# Altium PCB Plate_E.PcbDoc
Units mm, origin at the board's own origin, x right, y up, seen from the top; angles counter-clockwise.
Board outline 100 x 100 mm, 2 copper layers (Top Layer, Bottom Layer), stack 0.97 mm thick; 6 components, 2 nets, 10 pads, 0 vias.
Unrouted connection lines stored in the file: 2.
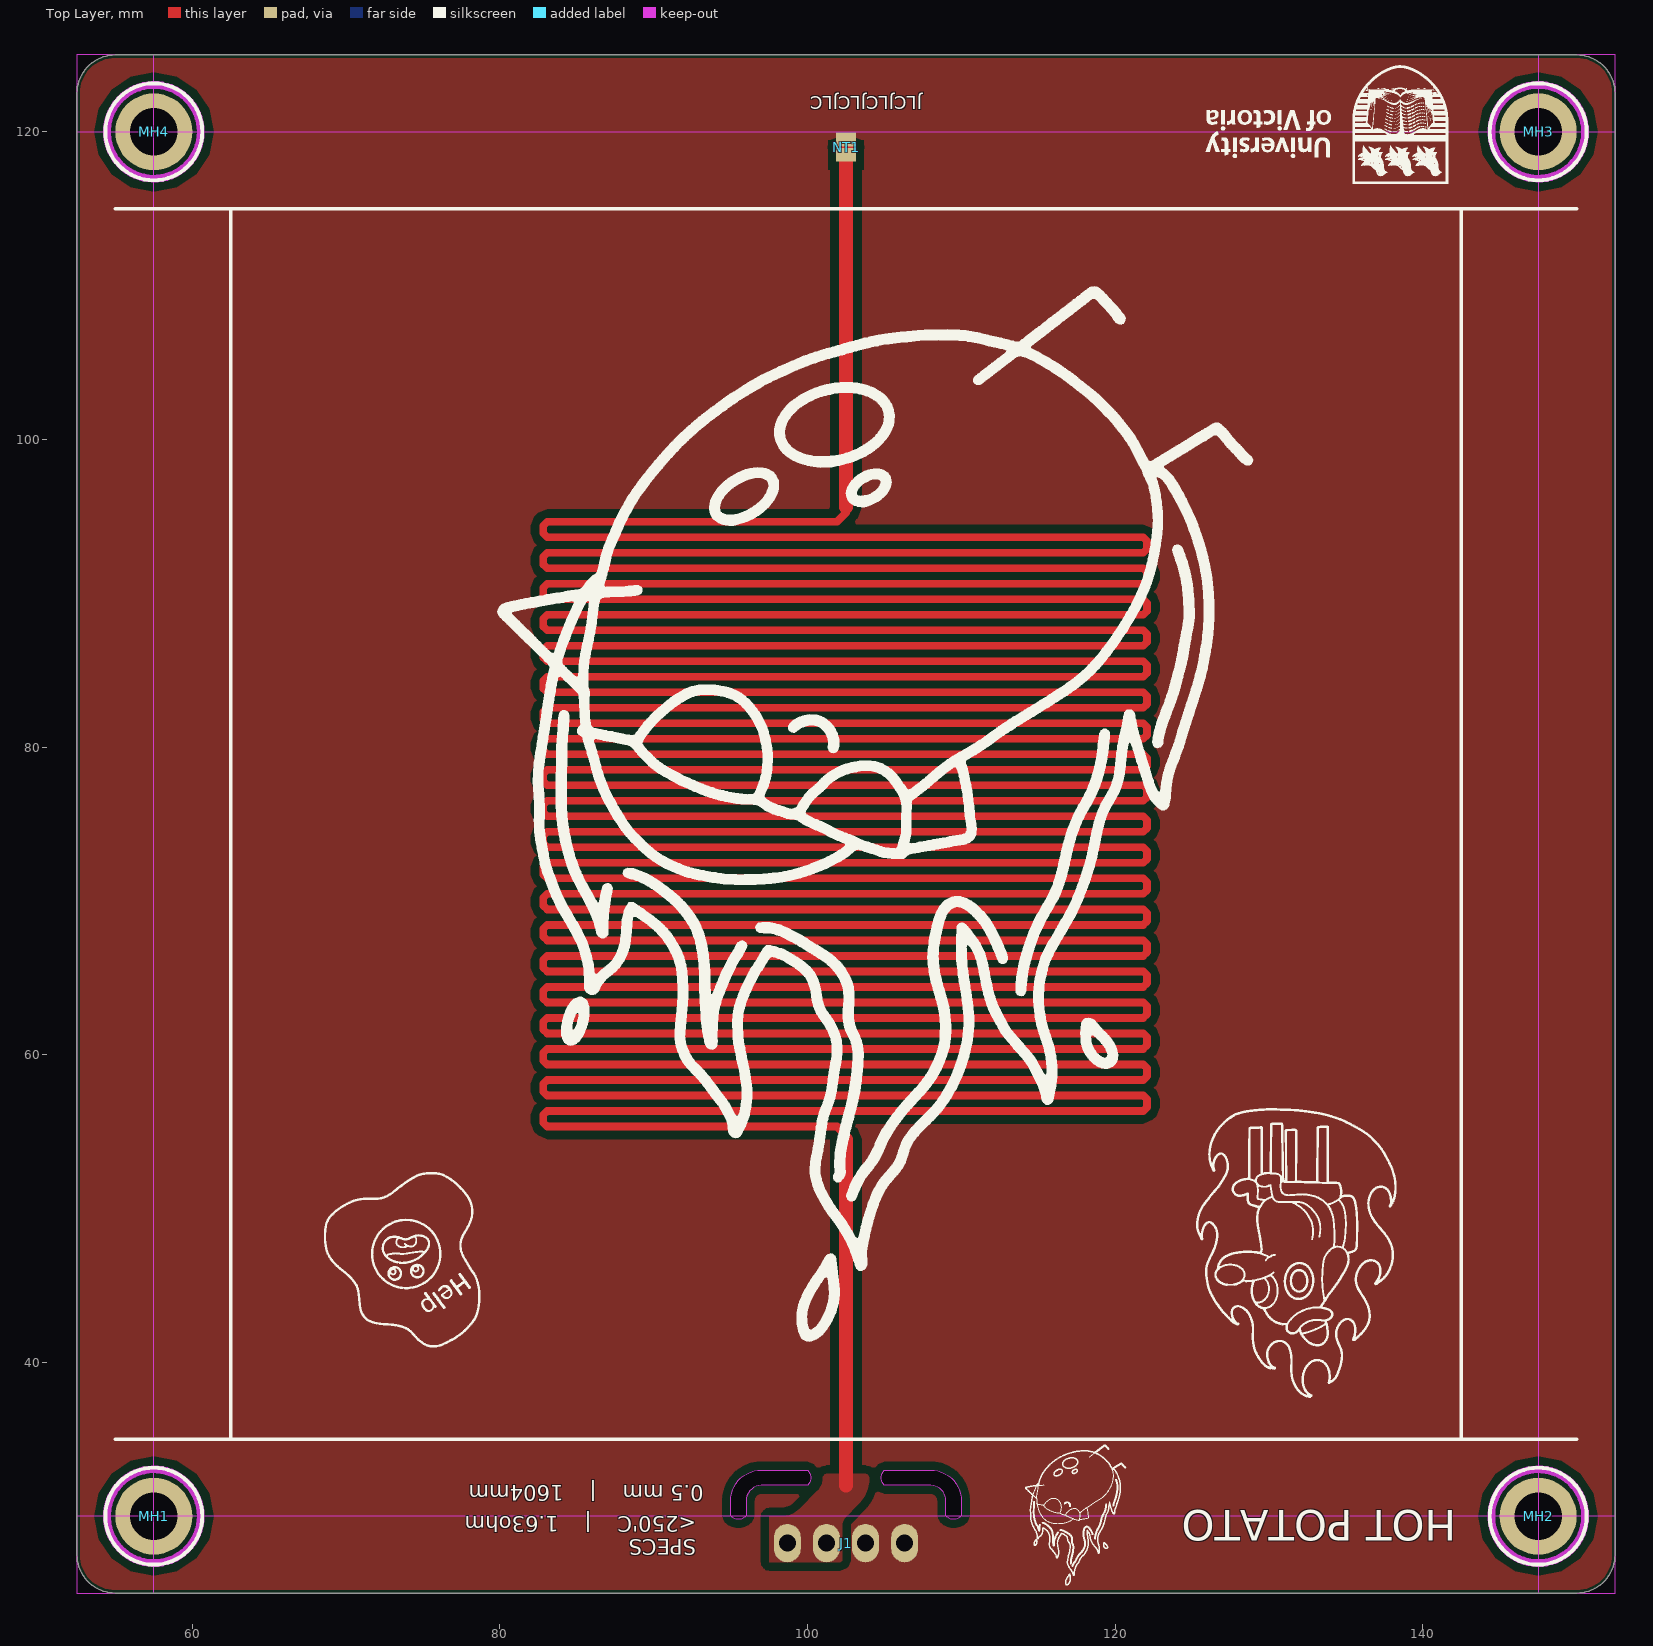
[diagram p0: Top Layer view]
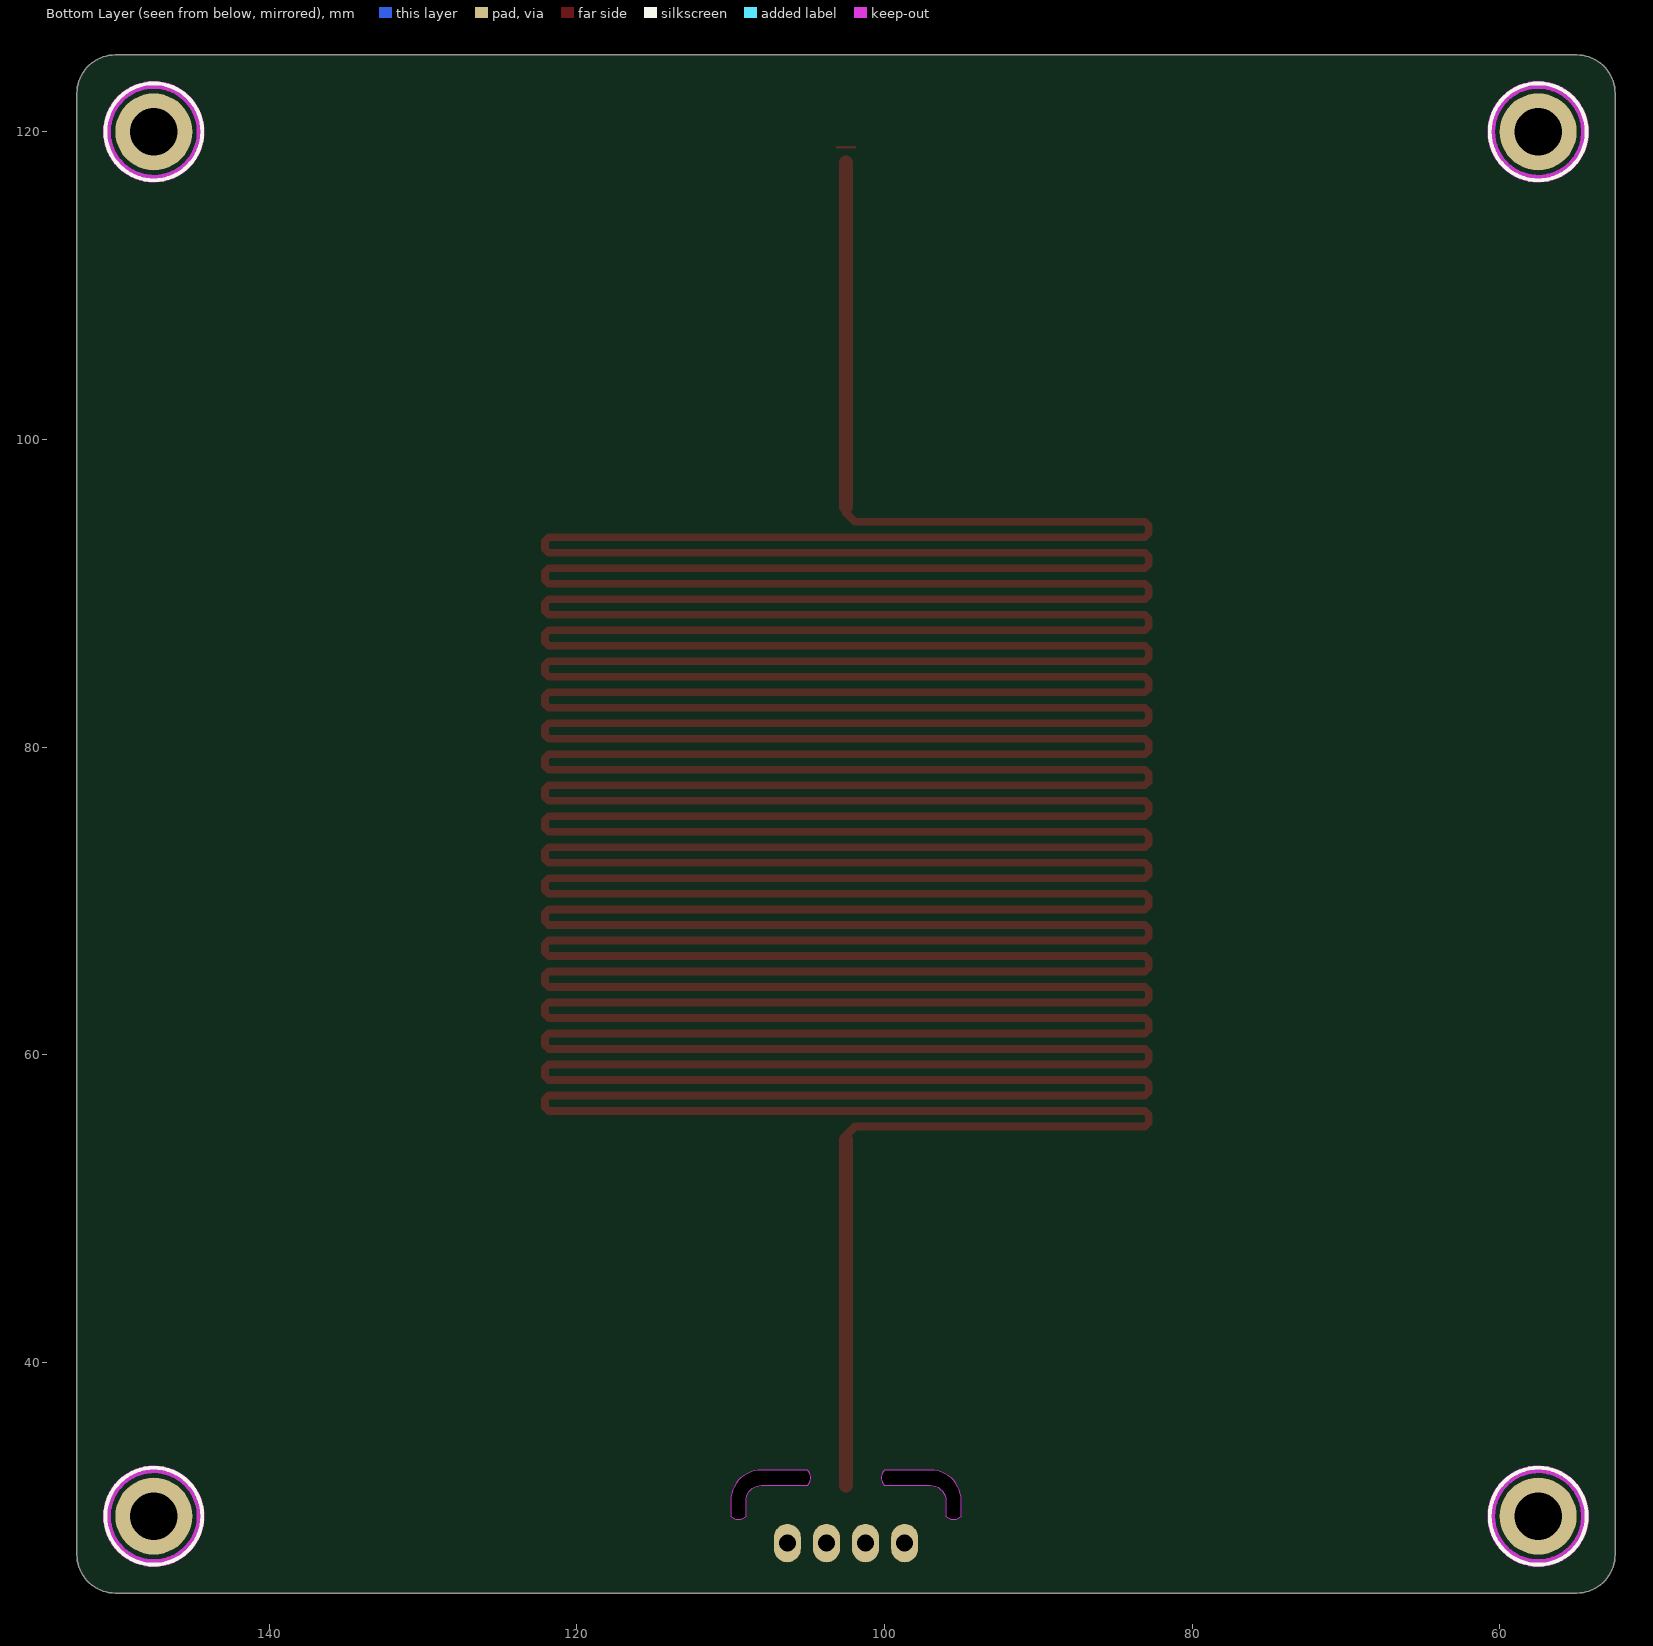
[diagram p1: Bottom Layer view, seen from below]

## Layer stack, top to bottom
Top Solder: solder mask 0.0127, Solder Resist, Dk 3.8
Top Layer: signal copper 0.035
Dielectric: core 0.9, FR-4, Dk 4.5
Bottom Layer: signal copper 0.035
Bottom Solder: solder mask 0.0127, Solder Resist, Dk 3.8

## Board outline
52.5,27.5 ccw(c55,27.5) 55,25 150,25 ccw(c150,27.5) 152.5,27.5 152.5,122.5 ccw(c150,122.5) 150,125 55,125 ccw(c55,122.5) 52.5,122.5
cut-out: 95,30 95,31 cw(c97,31) 97,33 100,33 cw(c99.5,32.5) 100,32 97,32 ccw(c97,31) 96,31 96,30 cw(c95.5,30.5)
cut-out: 105,32 cw(c105.5,32.5) 105,33 108,33 cw(c108,31) 110,31 110,30 cw(c109.5,30.5) 109,30 109,31 ccw(c108,31) 108,32

## Design rules (kind name [scope] priority, off if disabled: settings)
BoardOutlineClearance [All] p1: gap=0.2 ignorepadtopadclearanceinfootprint=FALSE
Clearance "Polygon Pour Clearance" [InPolygon] p1: gap=0.508 ignorepadtopadclearanceinfootprint=FALSE
Clearance [All] p2: gap=0.127 ignorepadtopadclearanceinfootprint=FALSE except(0.25: Arc-Hole Track-Hole SMDPad-Hole THPad-Hole Via-Hole Fill-Hole Poly-Hole Region-Hole Text-Hole)
ComponentClearance [All] p1: gap=0.127 collisioncheckmode=3 verticalgap=0.127 showdistances=TRUE
DiffPairsRouting [All] p1: maxlimit=0.254 minlimit=0.127 mostfreqgap=0.127 toplayer_minwidth=0.127 toplayer_maxwidth=25.4 toplayer_prefwidth=0.127 bottomlayer_minwidth=0.127 bottomlayer_maxwidth=25.4 bottomlayer_prefwidth=0.127 maxuncoupledlength=12.7
Height [All] p1: minheight=0 maxheight=1816.048 prefheight=12.7
HoleSize [All] p1: absolutevalues=TRUE maxlimit=6.3 minlimit=0.3 maxpercent=80.000 minpercent=20.000
HoleToHoleClearance [All] p1: gap=0.25 allowstackedmicrovias=FALSE
MinimumAnnularRing [All] p1: minimumring=0.076
MinimumSolderMaskSliver [All] p1: minsoldermaskwidth=0
PlaneClearance [All] p1: clearance=0.127
PlaneConnect PlaneConnectPowerPads [InPadClass('PowerPads')] p1: planeconnectstyle=Direct reliefexpansion=0.508 reliefentries=4 reliefconductorwidth=0.254 reliefairgap=0.254
PlaneConnect [All] p2: pad.planeconnectstyle=Relief pad.reliefexpansion=0.3 pad.reliefentries=4 pad.reliefconductorwidth=0.127 pad.reliefairgap=0.127 via.planeconnectstyle=Direct via.reliefexpansion=0.3 via.reliefentries=4 via.reliefconductorwidth=0.127 via.reliefairgap=0.127
PolygonConnect PolygonConnectPowerPads [All vs (InPadClass('PowerPads'))] p1: connectstyle=Direct reliefconductorwidth=0.254 reliefentries=4 polygonreliefangle="90 Angle" airgapwidth=0.254
PolygonConnect [All] p2: thpad.connectstyle=Relief thpad.reliefconductorwidth=0.127 thpad.reliefentries=4 thpad.polygonreliefangle="90 Angle" thpad.airgapwidth=0.127 smdpad.connectstyle=Relief smdpad.reliefconductorwidth=0.127 smdpad.reliefentries=4 smdpad.polygonreliefangle="90 Angle" smdpad.airgapwidth=0.127 via.connectstyle=Direct via.reliefconductorwidth=0.127 via.reliefentries=4 via.polygonreliefangle="90 Angle" via.airgapwidth=0.127
RoutingVias [All] p1: holewidth=0.3 width=0.6 viastyle="Through Hole" minholewidth=0.3 minwidth=0.6 maxholewidth=0.6 maxwidth=6.6
SilkToSilkClearance [All] p1: silktosilkclearance=0
SilkToSolderMaskClearance [IsPad] p1: minsilkscreentomaskgap=0.127 clearancetoexposedcopper=TRUE
SolderMaskExpansion [All] p1: expansion=0.075 istentingtop=FALSE
Width [All] p1: maxlimit=25.4 minlimit=0.127 preferedwidth=0.127 minimp=50.000000 maximp=50.000000 favimp=50.000000
20 further rules are at their usual default settings.

## Classes and differential pairs
component class plate: J1 MH1 MH2 MH3 MH4

## Components (designator, comment, footprint, x,y, rotation, side; value= is the part's Value field where it differs from the comment)
J1 "282834-4" "TE 282834-4" 102.5,28.25 r180 top
MH1 "3mm" Mount-Hole_3mm 57.5,30 r0 top locked
MH2 "3mm" Mount-Hole_3mm 147.5,30 r0 top locked
MH3 "3mm" Mount-Hole_3mm 147.5,120 r0 top locked
MH4 "3mm" Mount-Hole_3mm 57.5,120 r0 top locked
NT1 "Net Tie" NetTie_50mil 102.5,119 r270 top net-tie

## Footprints (in the part's own frame and the unit in brackets; to place one, negate y for a bottom-side part, rotate by r counter-clockwise, add the part's x,y. Pads: shape width x height; smd on the part's side, far side on the other; paste and mask are expansions set on the pad)
Mount-Hole_3mm [mm]
  round 5 hole 3.1: 1(0,0)
  Keep-Out Layer circle w0.508: c0,0 r3.048
  silkscreen extent -3.15,-3.15 3.15,3.15, body extent -2.25,-2.6 2.25,2.6, height 4.19
NetTie_50mil [mm]
  rect 0.889x1.27 smd mask+0.102: 1(-0.5,0) 2(0.5,0)
  Top Layer region: -0.075,0.635 0.075,0.635 0.075,-0.635 -0.075,-0.635
"TE 282834-4" [mm]
  oval 1.75x2.5 hole 1.1: 1(-3.81,0) 2(-1.27,0) 3(1.27,0) 4(3.81,0)
  body extent -5.31,-3.25 5.31,3.25, height 10

## Part data
J1: "TERM BLK 4P SIDE ENT 2.54MM PCB", Color=Green, Current=10A, Manufacturer="TE Connectivity AMP Connectors", Supplier Part Number 1=A98335-ND, Voltage=150V, ComponentLink1Description=Datasheet, ComponentLink1URL=https://www.te.com/commerce/DocumentDelivery/DDEController?Action=srchrtrv&DocNm=282834&DocType=Customer+Drawing&DocLang=English, ComponentLink2Description="DigiKey Link", ComponentLink2URL=http://digikey.com/product-detail/en/te-connectivity-amp-connectors/282834-4/A98335-ND/1153265, LastUpdated="2020-01-15 4:16:05 AM", Lifecycle Status=Active, Mating Orientation="Horizontal with Board", Minimum Order=1, Mounting Type="Through Hole", Number of Levels=1, Packaging=Bulk, Part Number=282834-4, Part Status=Active, Pitch="0.100\" (2.54mm)", Positions Per Level=4, Price=2.68, Series=Buchanan, Supplier 1=DigiKey, Wire Gauge="16-30 AWG", Wire Termination="Screw - Rising Cage Clamp"
MH1 MH2 MH3 MH4: library part Mount_Hole_3mm, "Mounting Hole 3mm plated"
NT1: library part NetTie_50mil, "Net Tie with 50mil trace"

## Nets (pads, with @x,y where several pads share a name; then routed paths per layer and width w, separated by ;. In a path a pad name is that pad's centre, name@x,y a point inside that pad or via, vN(x,y) a via of type N, cw(c..) or ccw(c..) an arc to the next point about the centre after c; other vN are vias at no path point)
PWR: J1.3 J1.4 NT1.2 | length 1604.8
  Top Layer w0.5: 102.5,54.5 102.5,54.75 101.914,55.336 83.073,55.336 82.821,55.588 82.821,56.092 83.073,56.344 121.822,56.344 122.074,56.596 122.074,57.1 121.822,57.352 83.073,57.352 82.821,57.604 82.821,58.108 83.073,58.36 121.822,58.36 122.074,58.612 122.074,59.116 121.822,59.368 83.073,59.368 82.821,59.62 82.821,60.124 83.073,60.376 121.822,60.376 122.074,60.628 122.074,61.132 121.822,61.384 83.073,61.384 82.821,61.636 82.821,62.14 83.073,62.392 121.822,62.392 122.074,62.644 122.074,63.148 121.822,63.4 83.073,63.4 82.821,63.652 82.821,64.156 83.073,64.408 121.822,64.408 122.074,64.66 122.074,65.164 121.822,65.416 83.073,65.416 82.821,65.668 82.821,66.172 83.073,66.424 121.822,66.424 122.074,66.676 122.074,67.18 121.822,67.432 83.073,67.432 82.821,67.684 82.821,68.188 83.073,68.44 121.822,68.44 122.074,68.692 122.074,69.196 121.822,69.448 83.073,69.448 82.821,69.7 82.821,70.204 83.073,70.456 121.822,70.456 122.074,70.708 122.074,71.212 121.822,71.464 83.073,71.464 82.821,71.716 82.821,72.22 83.073,72.472 121.822,72.472 122.074,72.724 122.074,73.228 121.822,73.48 83.073,73.48 82.821,73.732 82.821,74.236 83.073,74.488 121.822,74.488 122.074,74.74 122.074,75.244 121.822,75.496 83.073,75.496 82.821,75.748 82.821,76.252 83.073,76.504 121.822,76.504 122.074,76.756 122.074,77.26 121.822,77.512 83.073,77.512 82.821,77.764 82.821,78.268 83.073,78.52 121.822,78.52 122.074,78.772 122.074,79.276 121.822,79.528 83.073,79.528 82.821,79.78 82.821,80.284 83.073,80.536 121.822,80.536 122.074,80.788 122.074,81.292 121.822,81.544 83.073,81.544 82.821,81.796 82.821,82.3 83.073,82.552 121.822,82.552 122.074,82.804 122.074,83.308 121.822,83.56 83.073,83.56 82.821,83.812 82.821,84.316 83.073,84.568 121.822,84.568 122.074,84.82 122.074,85.324 121.822,85.576 83.073,85.576 82.821,85.828 82.821,86.332 83.073,86.584 121.822,86.584 122.074,86.836 122.074,87.34 121.822,87.592 83.073,87.592 82.821,87.844 82.821,88.348 83.073,88.6 121.822,88.6 122.074,88.852 122.074,89.356 121.822,89.608 83.073,89.608 82.821,89.86 82.821,90.364 83.073,90.616 121.822,90.616 122.074,90.868 122.074,91.372 121.822,91.624 83.073,91.624 82.821,91.876 82.821,92.38 83.073,92.632 121.822,92.632 122.074,92.884 122.074,93.388 121.822,93.64 83.073,93.64 82.821,93.892 82.821,94.396 83.073,94.648 101.914,94.648 102.5,95.234 102.5,95.59
  Top Layer w0.9: 102.5,32 102.5,54.5 ; 102.5,95.59 102.5,118
RETURN: J1.1 J1.2 NT1.1
pads on no net: MH1.1 MH2.1 MH3.1 MH4.1

## Polygon pours and split planes (outlines as drawn)
RETURN on Top Layer "RETURN_L01_P007" (solid, pour order 7): 52.5,125 152.5,125 152.5,25 52.5,25
PWR on Top Layer "ggg" (solid, pour order 5): 101.25,32.75 103.75,32.75 cw(c103.75,32.5) 104,32.5 cw(c101.497,32.499) 103.266,30.728 102.473,29.936 ccw(c103.013,29.396) 102.25,29.396 102.25,27 97.5,27 97.5,30 98.293,30 ccw(c98.293,31.707) 99.5,30.5 100.646,31.646 ccw(c99.793,32.5) 101,32.5 cw(c101.25,32.5)

## Keep-outs
Top Layer:
  region: 52.5,120 152.5,120 152.5,125 52.5,125
  region: 52.5,25 152.5,25 152.5,30 52.5,30
  region: 147.5,125 147.5,25 152.5,25 152.5,125
  region: 52.5,125 52.5,25 57.5,25 57.5,125

## Silkscreen, mask and mechanical layers (free items; w line width, h text height)
Top Overlay:
  drawing of 205 lines, arcs and shapes, not listed
  text "JLCJLCJLCJLC" at 107.457,122.3 h0.85 r180
  text "0.5 mm    |    1604mm" at 93.25,32 h1 r180
  text "HOT POTATO" at 142.164,30.4 h2 r180
  text "SPECS / <250'C    |    1.63ohm" at 92.75,30 h1 r180
Dimensions:
  lines w0.254: 52.5,75 152.5,75 ; 102.5,25 102.5,125 ; 152.5,25 52.5,125 ; 52.5,25 152.5,125 ; 52.5,25 52.5,25 ; 52.5,125 52.5,125 ; 52.5,125 52.5,125 ; 152.5,125 152.5,125
Board:
  lines w0.254: 52.5,27.5 ccw(c55,27.5) 55,25 150,25 ccw(c150,27.5) 152.5,27.5 152.5,122.5 ccw(c150,122.5) 150,125 55,125 ccw(c55,122.5) 52.5,122.5 52.5,27.5 ; 95,30 ccw(c95.5,30.5) 96,30 96,31 cw(c97,31) 97,32 100,32 ccw(c99.5,32.5) 100,33 97,33 ccw(c97,31) 95,31 95,30 ; 105,32 cw(c105.5,32.5) 105,33 108,33 cw(c108,31) 110,31 110,30 cw(c109.5,30.5) 109,30 109,31 ccw(c108,31) 108,32 105,32
Formula:
  text "Setting Trace Length and Width: /  Trace Length: PCB panel -> NET name PWR -> \"Routed Length\" /                Adj: Select Hotplate traces -> Tweak \"Space\" /  Trace Width: Select Base or tale of track -> properties -> \"Width\" /                Adj: Select Hotplate Traces -> *DELETE* -> Change Width -> \"Interactively tune Trace Length:" at 160,122.5 h1.52

## Dimensions
57.5,30 to 57.5,120 on Dimensions
57.5,120 to 147.5,120 on Dimensions
57.5,120 to 55,125 on Dimensions
57.5,120 to 52.5,122.5 on Dimensions
52.5,25 to 52.5,125 on Dimensions
52.5,125 to 152.5,125 on Dimensions